# Altium PCB lisa_mx_s_quad.PcbDoc
Units mm, origin at the board's own origin, x right, y up, seen from the top; angles counter-clockwise.
Board outline 25.5 x 25.5 mm, 4 copper layers (Top Layer, Vcc, GND, Bottom Layer); 67 components, 66 nets, 262 pads, 72 vias.
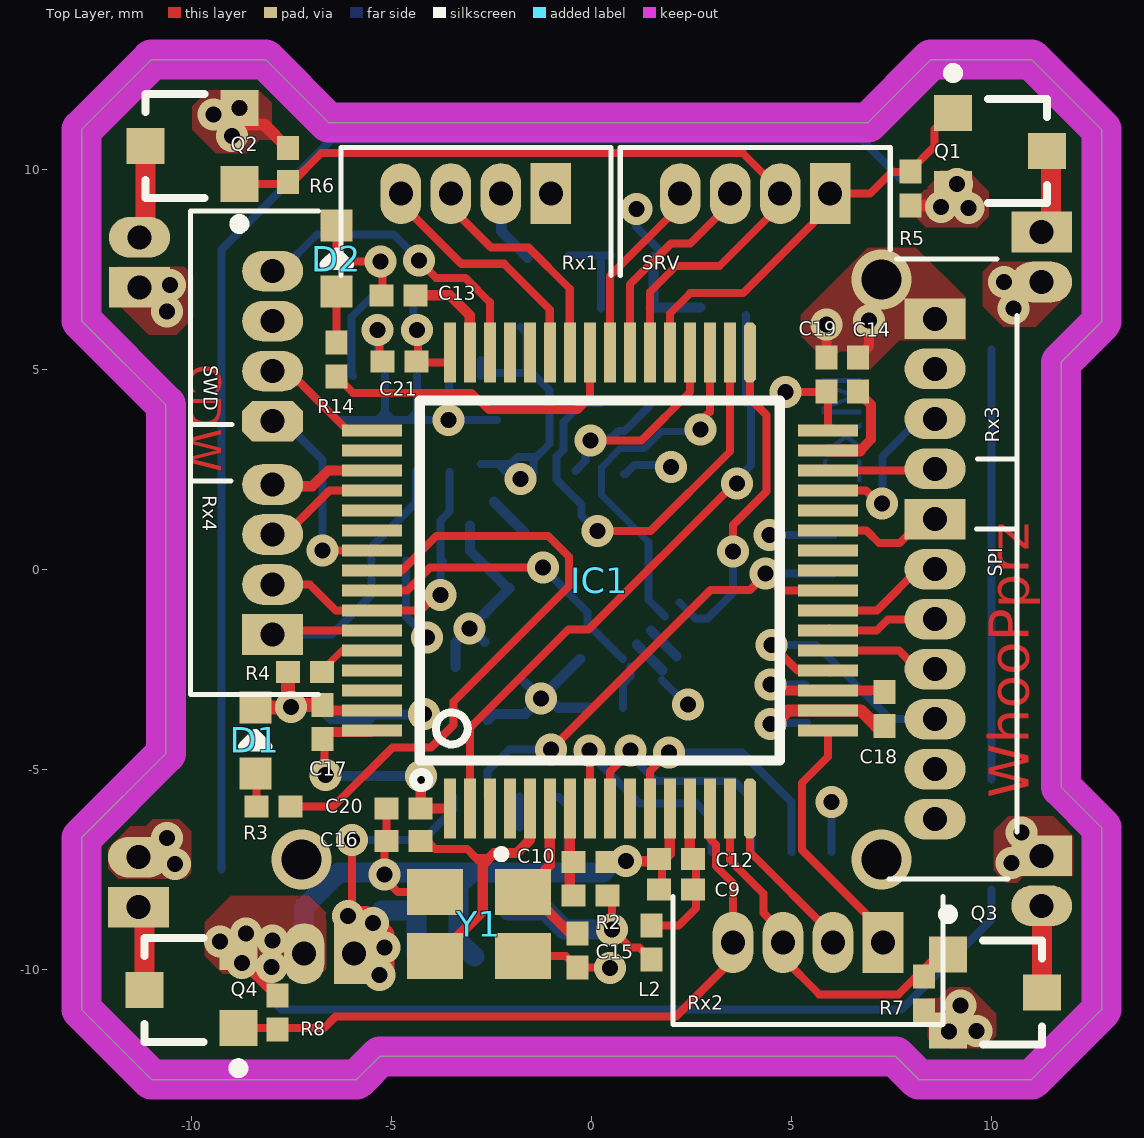
[diagram p0: Top Layer view]
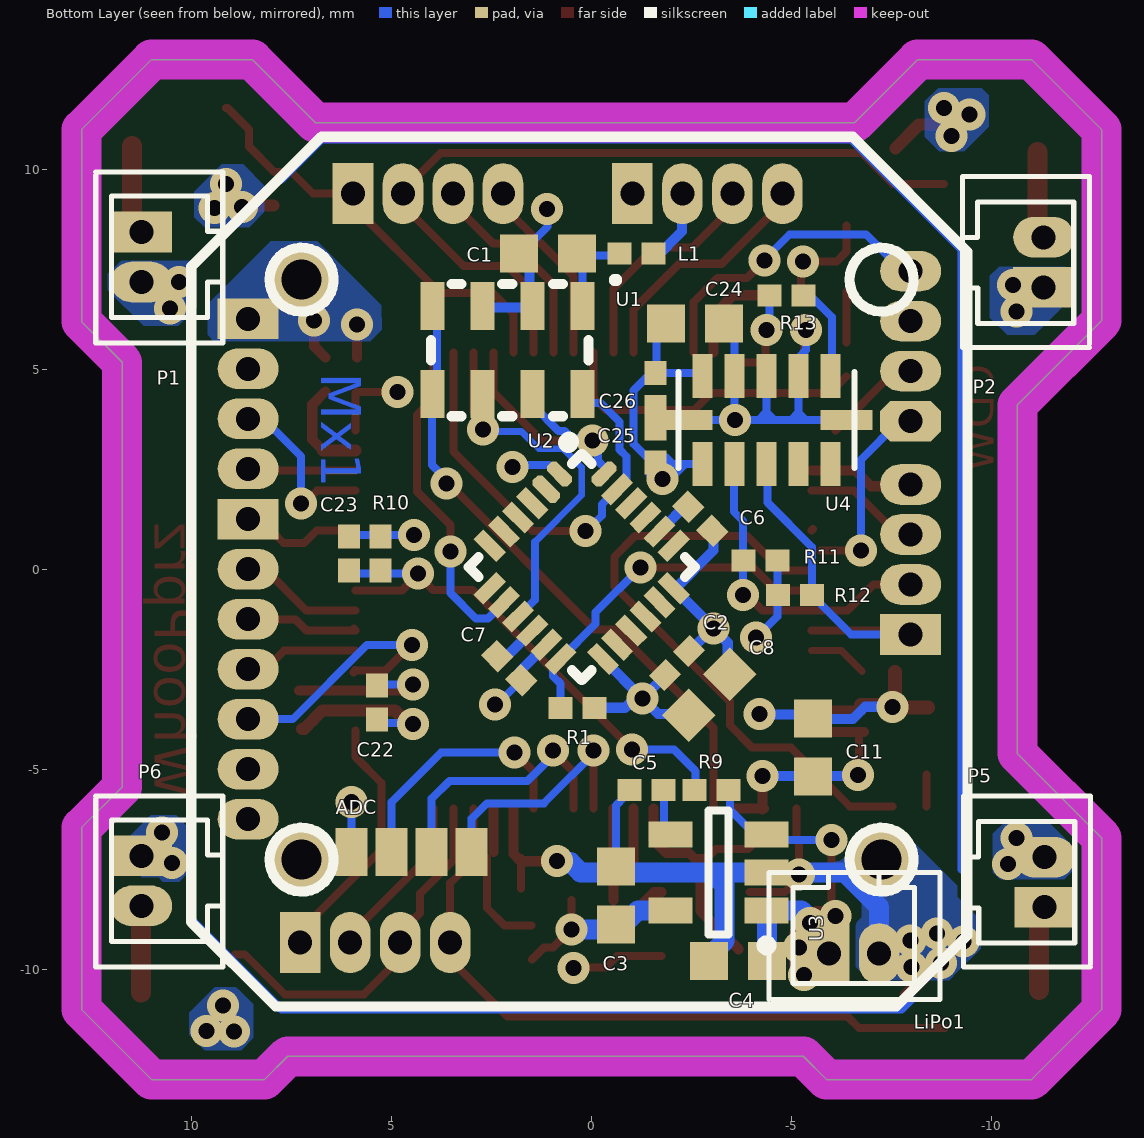
[diagram p1: Bottom Layer view, seen from below]
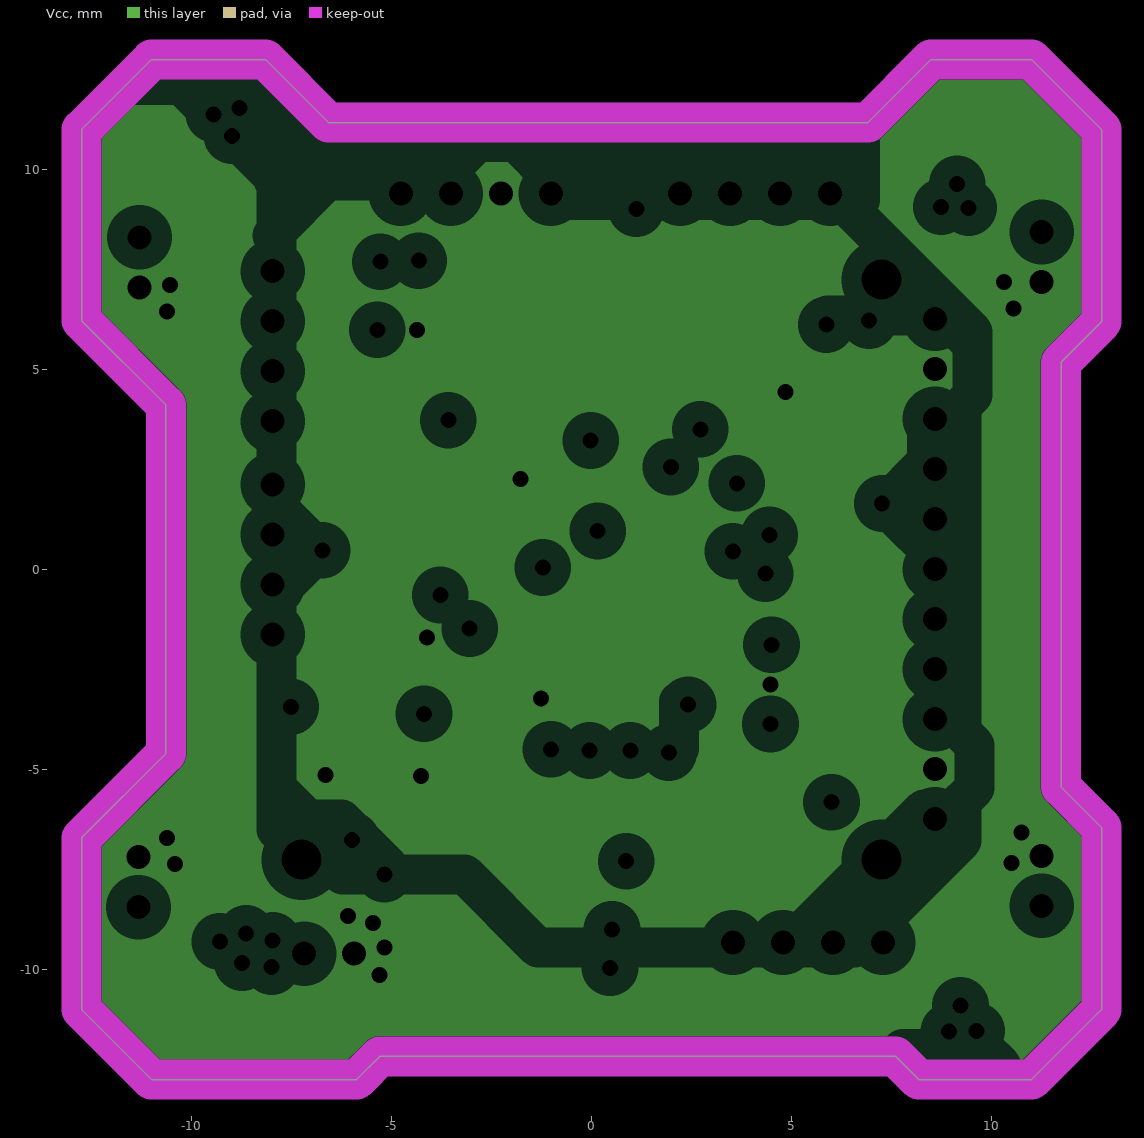
[diagram p2: Vcc, clearances drawn from the general rule]
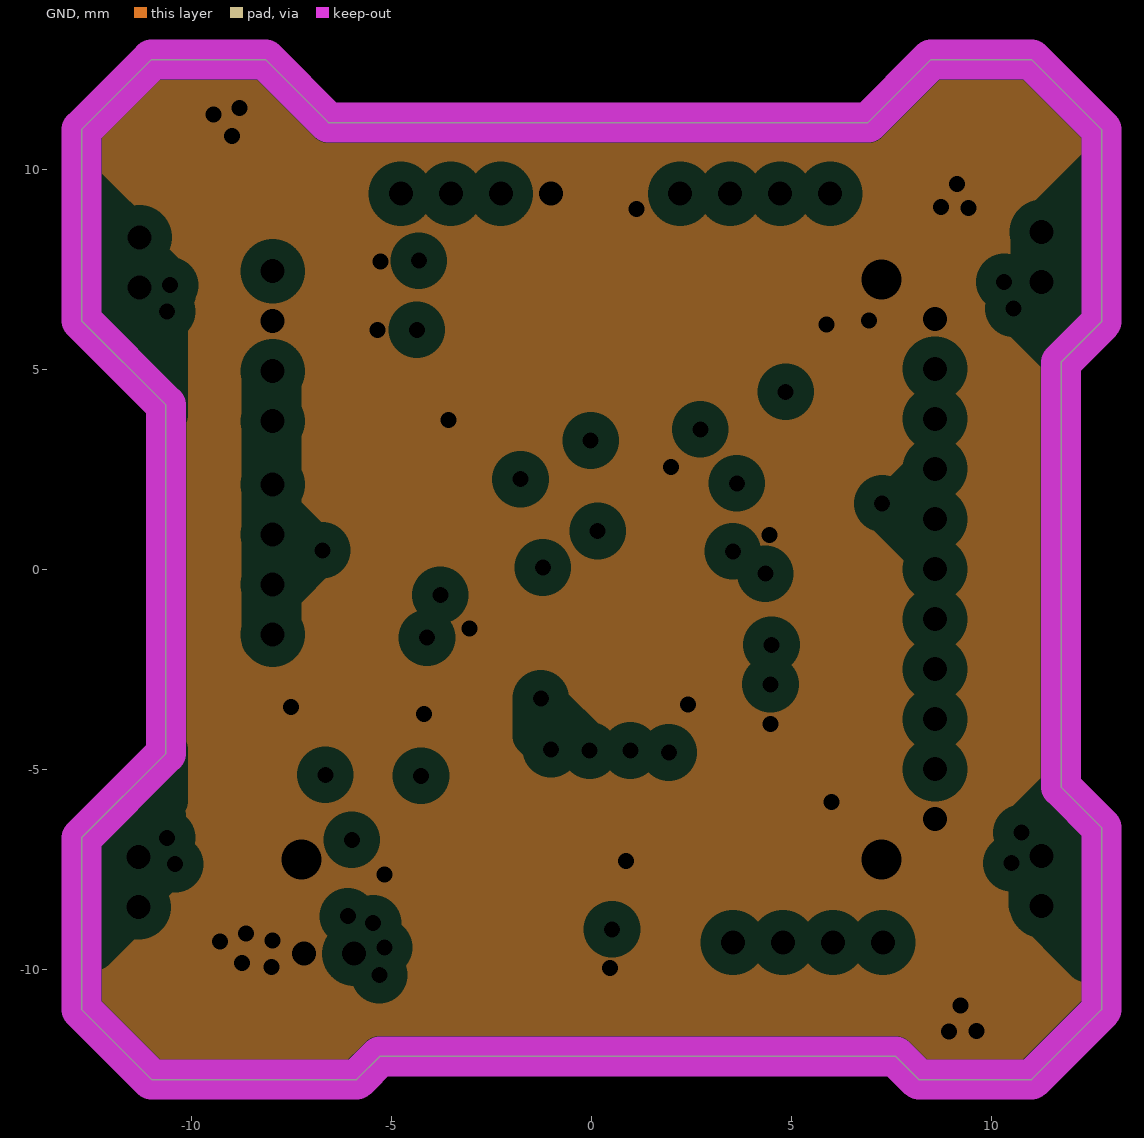
[diagram p3: GND, clearances drawn from the general rule]

## Layer stack, top to bottom
Top Layer: signal copper 0.0356
Dielectric: core 0.32, FR-4, Dk 4.8
Vcc: plane copper 0.0356, net (Multiple Nets)
Dielectric: prepreg 0.32, FR-4, Dk 4.8
GND: plane copper 0.0356, net GND
Dielectric: core 0.32, FR-4, Dk 4.8
Bottom Layer: signal copper 0.0356

## Board outline
-11,-12.75 -12.75,-11 -12.75,-6.705 -10.642,-4.597 -10.642,4.115 -12.75,6.223 -12.75,11 -11,12.75 -8.151,12.75 -6.578,11.177 6.909,11.177 8.483,12.75 11,12.75 12.75,11 12.75,6.197 11.735,5.182 11.735,-5.435 12.75,-6.45 12.75,-11 11,-12.75 8.179,-12.75 7.595,-12.166 -5.291,-12.166 -5.875,-12.75

## Design rules (kind name [scope] priority, off if disabled: settings)
Clearance [All] p1: gap=0.15
ComponentClearance [All] p1 off: gap=0.254 collisioncheckmode=3 verticalgap=0.254 showdistances=FALSE
MinimumSolderMaskSliver [All] p1 off: minsoldermaskwidth=0.254
NetAntennae [All] p1 off: netantennaetolerance=0
PlaneClearance [All] p1: clearance=0.508
PlaneConnect [All] p1: planeconnectstyle=Direct reliefexpansion=0.508 reliefentries=4 reliefconductorwidth=0.254 reliefairgap=0.254
PolygonConnect [All] p1: connectstyle=Direct reliefconductorwidth=0.254 reliefentries=4 polygonreliefangle="90 Angle"
RoutingVias [All] p1: holewidth=0.711 width=1.27 viastyle="Through Hole" minholewidth=0.4 minwidth=0.8 maxholewidth=2 maxwidth=3
SilkToSilkClearance [All] p1 off: silktosilkclearance=0.254
SilkscreenOverComponentPads [All] p1 off: minsilkscreentomaskgap=0.254
SolderMaskExpansion SolderMaskExpansion_1 [IsVia] p1: expansion=-1
SolderMaskExpansion [All] p2: expansion=0.102
TestPointUsage [All] p1: valid=0 allowmultiple=FALSE
Testpoint [All] p1: side=15 testpointundercomponent=TRUE minsize=1.016 maxsize=2.54 preferedsize=1.524 minholesize=0 maxholesize=1.016 preferedholesize=0.813 testpointgrid=0.025 style=1023 order=0-112345678
Width [All] p1: maxlimit=0.5 minlimit=0.15 preferedwidth=0.254 toplayer_prefwidth=0.2 bottomlayer_prefwidth=0.2 minimp=50.000000 maximp=50.000000 favimp=50.000000
17 further rules are at their usual default settings.

## Classes and differential pairs
component class LISA_MX: A_JTAG A_JTAG2 ADC C1 C2 C3 C4 C5 C6 C7 C8 C9 C10 C11 C12 C13 C14 C15 C16 C17 C18 C19 C20 C21 C22 C23 C24 C25 C26 C? D1 D2 IC1 L1 L2 R1 R2 R3 R4 R9 R10 R11 R12 R13 R14 R? Rx1 Rx2 Rx3 Rx4 SPI SRV SWD U1 U2 U3 U4 X5 Y1
component class whoop: LiPo1 P1 P2 P5 P6 Q1 Q2 Q3 Q4 R5 R6 R7 R8

## Components (designator, comment, footprint, x,y, rotation, side; value= is the part's Value field where it differs from the comment)
ADC "Header 4" 4pin1mmpitch 2.998,-7.061 r0 bottom
C1 "0603" V0603 1.093,7.9 r180 bottom
C2 "0402" V0402 -2.133,-2.336 r135 bottom
C3 "0603" V0603 -0.609,-8.153 r270 bottom
C4 "0603" V0603 -3.657,-9.778 r180 bottom
C5 "0402" V0402 -1.371,-5.511 r180 bottom
C6 "0402" V0402 -2.717,1.271 r225 bottom
C7 "0402" V0402 2.058,-2.463 r225 bottom
C8 "0603" V0603 -2.946,-3.124 r315 bottom
C9 "0402" V0402 2.109,-8 r0 top
C10 "0402" V0402 -0.025,-7.315 r180 top
C11 "0603" V0603 -5.537,-4.444 r90 bottom
C12 "0402" V0402 2.109,-7.238 r0 top
C13 "0402" V0402 -4.825,6.859 r0 top
C14 "0402" V0402 6.655,4.877 r270 top
C15 "0402" V0402 -0.355,-9.524 r90 top
C16 "0402" V0402 -4.698,-6.781 r180 top
C17 "0402" V0402 -6.73,-3.809 r270 top
C18 "0402" V0402 7.316,-3.479 r90 top
C19 "0402" V0402 5.868,4.877 r270 top
C20 "0402" V0402 -4.698,-5.968 r0 top
C21 "0402" V0402 -4.8,5.208 r0 top
C22 "0402" V0402 5.36,-3.327 r90 bottom
C23 "0402" V0402 6.071,0.407 r270 bottom
C24 "0603" V0603 -2.59,6.147 r0 bottom
C25 "0402" V0402 -1.6,3.099 r90 bottom
C26 "0402" V0402 -1.6,4.496 r270 bottom
D1 "RED" KP-1608SURC_R -8.407,-4.267 r90 top
D2 "RED" KP-1608SURC_R -6.375,7.772 r90 top
IC1 "STM32F40x-RG_Dirk" LQFP64 0.204,-0.271 r90 top
L1 "0402" V0402RES -1.117,7.9 r0 bottom
L2 "0402" V0402RES 1.499,-9.321 r90 top
LiPo1 "Header 2" PICOBLADE_53047-0210 -5.918,-9.601 r270 bottom
P1 "Header 2" PICOBLADE_53047-0210 11.253,8.459 r0 bottom
P2 "Header 2" PICOBLADE_53047-0210 -11.302,7.036 r180 bottom
P5 "Header 2" PICOBLADE_53047-0210 -11.328,-8.458 r180 bottom
P6 "Header 2" PICOBLADE_53047-0210 11.253,-7.137 r0 bottom
Q1 "N-FET" SOT23A_CDW 10.211,10.465 r270 top
Q2 "N-FET" SOT23A_CDW -9.982,10.592 r90 top
Q3 "N-FET" SOT23A_CDW 10.084,-10.566 r270 top
Q4 "N-FET" SOT23A_CDW -10.007,-10.515 r90 top
R1 "0402" V0402RES 0.356,-3.454 r180 bottom
R2 "0402" V0402RES -0.025,-8.153 r0 top
R3 "0402" V0402RES -7.95,-5.918 r180 top
R4 "0402" V0402RES -7.162,-2.565 r0 top
R5 "0402" V0402RES 7.976,9.526 r90 top
R6 "0402" V0402RES -7.594,10.11 r270 top
R7 "0402" V0402RES 8.306,-10.591 r90 top
R8 "0402" V0402RES -7.848,-11.074 r270 top
R9 "0402" V0402RES -2.997,-5.511 r180 bottom
R10 "0402" V0402RES 5.284,0.407 r270 bottom
R11 "0402" V0402RES -4.216,0.229 r180 bottom
R12 "0402" V0402RES -5.079,-0.634 r0 bottom
R13 "0402" V0402RES -4.877,6.858 r0 bottom
R14 "0402" V0402RES -6.375,5.258 r90 top
Rx1 "Header 4" PICOBLADE_53047-0410#1 -1.117,9.424 r90 top
Rx2 "Header 4" PICOBLADE_53047-0410#1 7.189,-9.296 r90 top
Rx3 "Header 4" PICOBLADE_53047-0410#1 8.56,6.173 r180 top
Rx4 "Header 4" PICOBLADE_53047-0410#1 -7.95,-1.523 r0 top
SPI "Header 7" PICOBLADE_53047-0710 8.586,1.194 r180 top
SRV "Header 4" PICOBLADE_53047-0410#1 5.868,9.424 r90 top
SWD "Header 4" PICOBLADE_53047-0410#2 -7.95,3.811 r0 top
U1 "MS5611-01BA01 or 03" MS5611-01BA 2.109,5.487 r270 bottom
U2 "MPU6000, MPU6050 or MPU9150" MPU60X0 0.247,0.066 r225 bottom
U3 "3.3V LDO" SOT-23-OT5_N -3.174,-7.569 r0 bottom
U4 "VL53L0X" VL53L0Xtra -4.368,3.734 r0 bottom
Y1 "3SMXB" CFPX-5 -2.819,-8.864 r180 top

## Footprints (in the part's own frame and the unit in brackets; to place one, negate y for a bottom-side part, rotate by r counter-clockwise, add the part's x,y. Pads: shape width x height; smd on the part's side, far side on the other; paste and mask are expansions set on the pad)
4pin1mmpitch [mm]
  rect 0.8x1.2 smd: 1(0,0) 2(1,0) 3(2,0) 4(3,0)
CFPX-5 [mm] "Quartz Crystal, SM; Body 3.4 x 2.7 mm (LxW max)"
  rect 1.4x1.15 smd: 1(-1.1,-0.8) 2(1.1,-0.8) 3(1.1,0.8) 4(-1.1,0.8)
  silkscreen extent -0.66,-1.85 -0.46,-1.65, body extent -1.9,-1.48 1.9,1.48, height 1
KP-1608SURC_R [mm]
  rect 0.8x0.8 smd: 1(-0.825,0) 2(0.825,0)
  silkscreen extent -0.15,-0.3 0.15,0.3, body extent -0.81,-0.41 0.79,0.38, height 1
LQFP64 [mm]
  rect 1.5x0.3 smd: 1(-5.7,3.75) 2(-5.7,3.25) 3(-5.7,2.75) 4(-5.7,2.25) 5(-5.7,1.75) 6(-5.7,1.25) 7(-5.7,0.75) 8(-5.7,0.25) 9(-5.7,-0.25) 10(-5.7,-0.75) 11(-5.7,-1.25) 12(-5.7,-1.75) 13(-5.7,-2.25) 14(-5.7,-2.75) 15(-5.7,-3.25) 34(5.7,-3.25) 35(5.7,-2.75) 36(5.7,-2.25) 37(5.7,-1.75) 38(5.7,-1.25) 39(5.7,-0.75) 40(5.7,-0.25) 41(5.7,0.25) 42(5.7,0.75) 43(5.7,1.25) 44(5.7,1.75) 45(5.7,2.25) 46(5.7,2.75) 47(5.7,3.25) 48(5.7,3.75)
  oct 1.5x0.3 smd: 16(-5.7,-3.75) 33(5.7,-3.75)
  rect 0.3x1.5 smd: 17(-3.75,-5.7) 18(-3.25,-5.7) 19(-2.75,-5.7) 20(-2.25,-5.7) 21(-1.75,-5.7) 22(-1.25,-5.7) 23(-0.75,-5.7) 24(-0.25,-5.7) 25(0.25,-5.7) 26(0.75,-5.7) 27(1.25,-5.7) 28(1.75,-5.7) 29(2.25,-5.7) 30(2.75,-5.7) 31(3.25,-5.7) 32(3.75,-5.7) 49(3.75,5.7) 50(3.25,5.7) 51(2.75,5.7) 52(2.25,5.7) 53(1.75,5.7) 54(1.25,5.7) 55(0.75,5.7) 56(0.25,5.7) 57(-0.25,5.7) 58(-0.75,5.7) 59(-1.25,5.7) 60(-1.75,5.7) 61(-2.25,5.7) 62(-2.75,5.7) 63(-3.25,5.7) 64(-3.75,5.7)
  silkscreen extent -5.19,-4.5 4.5,4.67, body extent -4.5,-4.5 4.5,4.5, height 2.54
MPU60X0 [mm] "4X4MM"
  oct 0.724x0.345 smd: 1(-2.038,1.25)
  oct 0.8x0.345 smd: 2(-2,0.75)
  rect 0.8x0.345 smd: 3(-2,0.25) 4(-2,-0.25) 5(-2,-0.75) 6(-2,-1.25) 13(2,-1.25) 14(2,-0.75) 15(2,-0.25) 16(2,0.25) 17(2,0.75) 18(2,1.25)
  rect 0.345x0.8 smd: 7(-1.25,-2) 8(-0.75,-2) 9(-0.25,-2) 10(0.25,-2) 11(0.75,-2) 12(1.25,-2) 19(1.25,2) 20(0.75,2) 21(0.25,2) 22(-0.25,2) 23(-0.75,2)
  oct 0.345x0.724 smd: 24(-1.25,2.038)
  silkscreen extent -2.44,-2 2,2, body extent -2,-2 2,2, height 0.9
MS5611-01BA [mm] "Precision Barometer"
  rect 1.2x0.6 smd: 1(-1.1,1.875) 2(-1.1,0.625) 3(-1.1,-0.625) 4(-1.1,-1.875) 5(1.1,-1.875) 6(1.1,-0.625) 7(1.1,0.625) 8(1.1,1.875)
  silkscreen extent -1.78,-1.91 1.65,2.74, body extent -1.5,-2.5 1.5,2.5, height 1.7
PICOBLADE_53047-0210 [mil]
  rect 60x40 hole 23.62: 1(0,0.79)
  oval 60x40 hole 23.62: 2(0,50)
  silkscreen extent -80,-58 45,110, body extent -80,-60 45,110, height 118
PICOBLADE_53047-0410#1 [mil]
  rect 60x40 hole 23.62: 1(-1,-3.82)
  oval 60x40 hole 23.62: 2(-1,45.39) 3(-1,94.61) 4(-1,143.82)
  silkscreen extent -82,-63 44,203
PICOBLADE_53047-0410#2 [mil]
  oct 60x40 hole 23.62: 1(-1,-3.82)
  oval 60x40 hole 23.62: 2(-1,45.39) 3(-1,94.61) 4(-1,143.82)
  silkscreen extent -82,-63 44,203
PICOBLADE_53047-0710 [mil]
  rect 60x40 hole 23.62: 1(0,-2.64)
  oval 60x40 hole 23.62: 2(0,46.57) 3(0,95.79) 4(0,145) 5(0,194.21) 6(0,243.43) 7(0,292.64)
  silkscreen extent -81,-62 45,352
SOT23A_CDW [mm] "SOT-23; 3 Leads; Body 3.0 x 2.5 mm, inc. leads (LxW max)"
  rect 0.9x0.95 smd: 1(-0.95,-1.175) 2(0.95,-1.175) 3(0,1.175)
  silkscreen extent -2.07,-1.3 1.3,1.18, body extent -1.27,-1.46 1.27,1.46, height 1.3
SOT-23-OT5_N [mm] "SOT23, 5-Leads, Body 2.9x1.6mm, Pitch 0.95mm, Lead Span 2.7mm, IPC Medium Density"
  rect 1.1x0.65 smd: 1(-1.2,0.95) 2(-1.2,0) 3(-1.2,-0.95) 4(1.2,-0.95) 5(1.2,0.95)
  silkscreen extent -1.32,-1.55 0.25,1.95, body extent -0.9,-1.55 0.9,1.55, height 1.45
V0402 [mm] "Chip Capacitor; Body 1.0 x 0.5 mm (LxW typ)"
  rect 0.6x0.55 smd: 1(-0.425,0) 2(0.425,0)
  body extent -0.5,-0.25 0.5,0.25, height 0.5
V0402RES [mm] "Chip Capacitor; Body 1.0 x 0.5 mm (LxW typ)"
  rect 0.6x0.55 smd: 1(-0.425,0) 2(0.425,0)
  body extent -0.5,-0.25 0.5,0.25, height 0.25
V0603 [mm] "Chip Capacitor; Body 1.6 x 0.8 mm (LxW typ)"
  rect 0.95x0.95 smd: 1(-0.725,0) 2(0.725,0)
  body extent -0.8,-0.4 0.8,0.4, height 0.7
VL53L0Xtra [mm]
  rect 0.5x1.1 smd: 1(1.6,-1.1) 2(0.8,-1.1) 3(0,-1.1) 4(-0.8,-1.1) 5(-1.6,-1.1) 7(-1.6,1.1) 8(-0.8,1.1) 9(0,1.1) 10(0.8,1.1) 11(1.6,1.1)
  rect 1.3x0.5 smd: 6(-2,0) 12(2,0)
  silkscreen extent -2.2,-1.2 2.2,1.2, body extent -2.2,-1.2 2.2,1.2, height 1.05

## Part data
ADC Rx1 Rx2 Rx3 Rx4 SRV SWD: "Header, 4-Pin"
C1 C5 C8 C9 C10 C11 C12 C13 C14 C15 C16 C17 C18 C19 C20 C21 C22 C23: library part Cap, "Capacitor"
C2 C6 C7 C25 C26: library part CAP, "Capacitor"
C3 C4 C24: library part K0603_100nF_50V_X7R, "Capacitor"
D1 D2: library part LED2, "Typical RED, GREEN, YELLOW, AMBER GaAs LED"
L1 L2 R1 R2 R3 R4 R5 R6 R7 R8 R9 R10 R11 R12 R13 R14: library part Res3, "Resistor"
LiPo1 P1 P2 P5 P6: "Header, 2-Pin"
Q1 Q2 Q3 Q4: library part BSS138, "BSS138"
SPI: "Header, 7-Pin"
U1: library part MS5611-01BA01, "MS5611-01BA01 High Resolution Barometer Module"
U2: library part MPU6000, "INVENSENSE Integrated Dual Axis Gyroscope"
U3: library part LP2992AIM5-5.0, "Micropower 250 mA Low-Noise Ultra Low-Dropout Regulator in SOT-23 and LLP Packages"
Y1: "Surface Mount Quartz Crystal"

## Via types
v1: diameter 0.8, hole 0.4, Top Layer to Bottom Layer, 69 vias
v2: diameter 1.5, hole 1, Top Layer to Bottom Layer, 3 vias

## Nets (pads, with @x,y where several pads share a name; then routed paths per layer and width w, separated by ;. In a path a pad name is that pad's centre, name@x,y a point inside that pad or via, vN(x,y) a via of type N, cw(c..) or ccw(c..) an arc to the next point about the centre after c; other vN are vias at no path point)
+3.3V: C2.1 C3.2 C8.2 C11.1 C17.2 C18.2 C19.2 C20.2 C21.2 C22.2 C24.2 C25.1 C26.1 IC1.1 IC1.19 IC1.32 IC1.48 IC1.64 L1.1 L2.1 R1.2 R2.2 R11.2 R12.2 R13.2 Rx1.2 Rx3.2 SPI.6 U2.13 U3.5 U4.1 U4.11 | length 36
  Top Layer w0.2: v1@-6.68,-5.105 C17.2@-6.68,-4.235 ; C21.2@-4.417,5.182 IC1.48@-3.606,5.182 ; C21.2@-4.343,5.208 v1@-4.343,6.039 ; v1@-4.273,-5.162 v1(-4.267,-5.156) ; R2.2@0.509,-8.261 v1(0.509,-8.991) 0.964,-9.446 1.192,-9.446 L2.1@1.492,-9.746 ; v1(4.852,4.446) C19.2@5.861,4.446 ; IC1.32 C19.2@5.904,4.416
  Top Layer w0.254: C17.2@-6.811,-4.06 IC1.64@-5.536,-4.06 ; C20.2@-4.305,-5.971 IC1.1 ; C20.2@-4.273,-5.994 v1@-4.273,-5.162 ; v1@4.42,-2.641 4.8,-3.021 IC1.19 C18.2@7.316,-3.021
  Bottom Layer w0.2: R11.2 -4.641,-1.175 v1(-4.114,-1.701) ; v1@-4.452,6.007 R13.2 ; v1@-4.44,5.995 v1(-4.368,5.995) ; U4.11 v1@-1.912,2.634 ; U4.1 U4.1@-2.768,5.244 ; U4.1@-2.681,4.921 C26.1 ; -2.336,2.634 -2.065,2.363 -1.879,2.363 v1(-1.777,2.261) -1.676,2.363 -1.473,2.363 -1.447,2.388 C25.1@-1.447,2.751 ; -2.031,2.634 -1.846,2.82 -1.375,2.82 -1.049,3.146 -1.049,4.479 -1.625,5.055 -1.625,5.919 C24.2@-1.777,6.071 ; v1@4.496,-2.87 C22.2@5.353,-2.87
  Bottom Layer w0.254: v1@-6.73,-5.156 v1(-4.267,-5.156) ; C8.2@-2.611,-3.763 -2.454,-3.606 -1.657,-3.606 v1(-1.269,-3.218) ; Rx1.2@-2.27,8.982 -2.26,8.972 -2.26,8.459 L1.1@-1.6,7.798 ; C2.1@-1.653,-2.834 v1(-1.269,-3.218) ; v1@-1.177,-3.126 -1.165,-3.126 -0.838,-3.454 R1.2 ; U2.13 v1(-1.269,-3.218)
  Bottom Layer w0.5: U3.5@-2.076,-8.519 -1.158,-8.519 -0.685,-8.991 v1(0.509,-8.991)
  other v1: -6.655,-5.131 4.471,-2.87
+3.3V_AP_ANALOG: C9.2 C12.2 IC1.13 L2.2 | length 3.6
  Top Layer w0.2: L2.2 2.178,-8.896 2.61,-8.464 C12.2@2.61,-7.213
  Top Layer w0.254: C12.2@2.454,-7.058 IC1.13
ADC1A: ADC.3 IC1.11 | length 6.4
  Top Layer w0.2: IC1.11 1.454,-5.048 v1(1.931,-4.571)
  Bottom Layer w0.2: v1(1.931,-4.571) 3.76,-4.571 4.998,-5.809 ADC.3
ADC2A: ADC.1 IC1.8 | length 6.1
  Top Layer w0.2: v1@-0.304,-4.622 -0.046,-4.88 IC1.8
  Bottom Layer w0.2: v1@-0.126,-4.521 1.194,-5.841 2.617,-5.841 2.998,-6.222 ADC.1
  other v1: -0.05,-4.521
ADC3A: ADC.2 IC1.9 | length 6.7
  Top Layer w0.2: IC1.9 0.454,-5.058 0.813,-4.698 v1@0.813,-4.495
  Bottom Layer w0.2: v1@0.813,-4.495 1.601,-5.283 3.557,-5.283 3.998,-5.724 ADC.2
  other v1: 0.966,-4.521
BARO_CS: IC1.2 U1.4 U1.5 | length 15.6
  Top Layer w0.2: IC1.2 -3.046,-3.96 -0.584,-1.498 -0.076,-1.498 v1@3.581,2.159
  Bottom Layer w0.2: v1@3.581,2.21 3.988,2.617 U1.5@3.988,4.293 ; U1.5@3.861,4.166 U1.4@3.861,6.366
  other v1: 3.632,2.159
BOOTA: IC1.60 R4.2 | length 1.5
  Top Layer w0.178: R4.2@-6.756,-2.539 -6.241,-2.025 IC1.60@-5.504,-2.025
BYPCA: C5.2 U3.4 | length 0.8
  Bottom Layer w0.2: U3.4@-1.803,-6.452 C5.2@-1.803,-5.675
CPOUT_A: C6.1 U2.20 | length 1.1
  Bottom Layer w0.254: C6.1@-2.444,1.696 U2.20
DRDY: IC1.27 SPI.1 | length 2.3
  Top Layer w0.2: IC1.27 6.87,0.979 7.189,0.661 7.697,0.661 SPI.1@7.976,0.94
GND: ADC.4 C1.1 C2.2 C3.1 C4.1 C5.1 C6.2 C7.2 C8.1 C9.1 C10.1 C11.2 C12.1 C13.1 C14.1 C15.1 C16.2 C17.1 C18.1 C19.1 C20.1 C21.1 C22.1 C23.1 C24.1 C25.2 C26.2 D1.2 D2.2 IC1.12 IC1.18 IC1.63 LiPo1.2 Q1.2 Q2.2 Q3.2 Q4.2 R4.1 R5.1 R6.1 R7.1 R8.1 R10.1 Rx1.1 Rx3.1 SPI.7 SWD.3 U1.2 U1.3 U2.1 U2.11 U2.18 U3.2 U4.2 U4.3 U4.4 U4.6 U4.12 Y1.2 Y1.4 | length 67.7
  Top Layer w0.2: D2.2 -6.375,7.95 -6.122,7.697 v1(-5.283,7.697) ; C21.1@-5.308,5.208 v1@-5.308,6.078 ; C13.1@-5.232,6.859 v1@-5.232,7.607 ; v1@-5.182,-7.779 C16.2@-5.182,-6.833 ; v1@-5.123,-7.779 -4.838,-8.064 Y1.2@-3.944,-8.064 ; C16.2 C20.1 ; Y1.4@-1.744,-9.664 -0.64,-9.664 C15.1 v1@0.451,-9.949 ; C9.1@1.76,-7.975 C12.1@1.76,-7.213
  Top Layer w0.254: C17.1@-6.761,-3.521 IC1.63 ; v1(0.864,-7.289) 1.771,-7.289 1.954,-7.107 IC1.12 ; C19.1 v1@5.868,6.381 ; C14.1 6.935,5.582 v1(6.935,6.228) v1@7.011,6.305
  Top Layer w0.305: v1(-8.991,10.846) -8.762,11.075 -8.762,11.278 -8.61,11.126 -8.185,11.126 R6.1 ; Q4.2@-8.832,-9.665 R8.1 ; v1@4.674,-3.759 4.912,-3.521 IC1.18 6.732,-3.521 6.956,-3.745 6.956,-3.755 7.186,-3.985 C18.1@7.235,-3.985 ; R5.1@7.951,9.101 Q1.2@8.706,9.101
  Top Layer w0.35: D1.2 v1@-7.532,-3.442 ; v1@-7.587,-3.271 R4.1 ; v1@-7.474,-3.384 C17.1
  Bottom Layer w0.2: U4.6 U4.12 ; -5.359,3.734 -5.168,3.925 ; v1(-5.359,5.995) -5.359,5.487 U4.4@-5.168,5.296 ; U4.4 -5.168,3.925 ; -4.978,3.734 -5.168,3.925 ; -4.571,3.734 -4.368,3.938 ; U4.3 -4.368,3.938 ; -4.165,3.734 -4.368,3.938 ; v1@-3.759,3.734 v1@-3.568,3.925 ; v1@-3.733,3.925 v1@-3.568,4.09 ; C24.1@-3.568,5.823 U4.2 v1@-3.568,3.925 ; v1@-3.378,3.734 v1@-3.568,3.925 ; C5.1@-0.971,-5.689 -0.813,-5.689 -0.609,-5.893 C3.1 ; U2.1 0.842,2.391 1.067,2.617 2.058,2.617 v1@2.109,2.668 ; v1@1.107,8.826 1.107,8.572 C1.1@1.652,8.027 ; C7.2 v1@2.371,-3.378 ; v1(4.446,0.864) C23.1@6.064,0.864 ; v1@4.496,-3.835 C22.1@5.379,-3.835 ; ADC.4 v1(5.998,-5.813)
  Bottom Layer w0.254: v1(-7.518,-3.428) -6.833,-3.428 -6.528,-3.734 C11.2@-5.537,-3.734 ; C11.2@-5.486,-3.618 v1@-4.369,-3.618 ; C8.1@-3.403,-2.438 -3.403,-1.828 v1(-3.047,-1.473) ; C6.2@-3.043,1.097 -3.043,0.479 -2.1,-0.464 U2.18 -3.037,-1.45 -2.679,-1.809 ; U2.11 C7.2@1.766,-2.514 ; U1.2@1.468,6.554 U1.3@2.718,6.554 ; U1.2@1.55,6.605 C1.1@1.55,7.812
  Bottom Layer w0.5: LiPo1.2@-7.188,-9.448 -7.188,-8.432 -6.324,-7.569 0.28,-7.569 v1@0.534,-7.315 ; -3.327,-7.594 -3.327,-8 ; -2.997,-7.569 -3.327,-7.899 -3.327,-8 ; C4.1@-2.932,-9.677 -3.327,-9.282 -3.327,-8
  other v1: 8.935,-11.541 9.627,-11.531 9.221,-10.896 0.458,-9.956 -8.001,-9.931 -8.738,-9.83 -9.296,-9.296 -7.976,-9.271 -8.636,-9.093 -5.181,-7.619 4.471,-3.86 -4.191,-3.607 2.414,-3.378 1.982,2.566 -3.581,3.734 5.868,6.122 1.118,9.018 9.424,9.043 8.738,9.068 9.138,9.642 -9.448,11.38 -8.807,11.542
  other v2: -7.25,-7.25 7.25,-7.25 7.25,7.25
GPIO: U4.7
IMU_CS: IC1.33 U2.8 | length 8.5
  Top Layer w0.2: v1(3.531,0.458) 3.531,1.118 4.369,1.956 4.369,3.862 3.954,4.277 IC1.33
  Bottom Layer w0.2: U2.8 2.592,-1.219 2.896,-1.219 3.531,-0.584 3.531,0.417 v1@3.673,0.559
IMU_MISO: IC1.35 U1.6 U2.9 | length 9.1
  Top Layer w0.2: v1@2.654,3.645 2.954,3.945 IC1.35
  Bottom Layer w0.17: 1.417,0.693 0.247,1.862 0.247,2.558 0.712,3.023 1.321,3.023 1.753,3.455 v1@2.718,3.455
  Bottom Layer w0.2: 1.417,0.693 1.417,-0.755 1.833,-1.171 U2.9
  other v1: 2.718,3.506
IMU_MOSI: IC1.36 U1.7 U2.24 | length 6.9
  Top Layer w0.2: v1@-0.177,3.226 1.245,3.226 2.454,4.435 IC1.36
  Bottom Layer w0.2: U2.24@-0.406,2.464 -0.158,2.712 v1@-0.158,3.22 ; v1@-0.152,3.277 0.483,3.277 0.674,3.468 0.826,3.468 U1.7@1.448,4.09
  other v1: -0.025,3.226
IMU_MPU_INT: IC1.57 R1.1 U2.12 | length 8.7
  Top Layer w0.203: IC1.57 -4.61,-0.521 -4.038,0.051 v1(-1.219,0.051)
  Bottom Layer w0.203: v1(-1.219,0.051) -0.101,-1.066 -0.101,-1.354 U2.12 ; R1.1 0.781,-2.851 0.966,-2.666 U2.12@0.966,-2.421
IMU_SCK: IC1.34 U1.8 U2.23 | length 11
  Top Layer w0.2: v1@0.128,0.966 1.474,0.966 3.455,2.947 IC1.34 IC1.34
  Bottom Layer w0.2: v1@0.166,0.928 -0.253,1.347 -0.253,1.627 U2.23 -0.877,2.251 -0.877,2.823 -0.699,3.001 -0.699,3.695 -0.228,4.166 U1.8@0.229,4.166
  other v1: 0.153,0.966
JTAG_TCK: IC1.49 SWD.2 | length 2.4
  Top Layer w0.2: SWD.2@-7.873,4.964 -7.579,4.964 IC1.49@-6.094,3.479
JTAG_TDI: IC1.50
JTAG_TDO: IC1.55 SWD.1 | length 4.6
  Top Layer w0.2: v1@-6.69,0.479 IC1.55@-5.718,0.479
  Bottom Layer w0.2: SWD.1@-7.873,3.714 -7.7,3.714 -6.73,2.744 -6.73,0.763 v1@-6.654,0.686
  other v1: -6.73,0.483
JTAG_TMS: IC1.46 SWD.4 | length 8
  Top Layer w0.2: v1(-4.317,7.722) -3.886,7.29 -3.15,7.29 -2.546,6.686 IC1.46
  Bottom Layer w0.2: SWD.4 -7.776,7.464 -6.857,8.383 -4.952,8.383 -4.356,7.786 v1@-4.025,7.786
L1: D2.1 R14.2 | length 1.3
  Top Layer w0.2: R14.2 D2.1
L2: D1.1 R3.2 | length 0.8
  Top Layer w0.2: R3.2 D1.1@-8.375,-5.124
LED1: IC1.41 R14.1 | length 7.9
  Top Layer w0.2: R14.1 -5.962,4.42 -2.997,4.42 -2.565,3.988 -0.356,3.988 -0.046,4.297 IC1.41
LED2: IC1.56 R3.1 | length 15.8
  Top Layer w0.2: R3.1 -6.452,-5.918 -4.978,-4.445 -4.013,-4.445 -3.454,-3.886 -3.454,-3.302 -0.569,-0.416 -0.569,0.321 -1.086,0.838 -3.884,0.838 -4.742,-0.021 IC1.56
LED3: IC1.10
LED4: IC1.25
LED5: IC1.4
LIPO: C4.2 LiPo1.1 P1.2 P2.1 P5.2 P6.1 R9.2 U3.1 U3.3 | length 10.6
  Top Layer w0.2: LiPo1.1@-5.994,-9.469 v1@-5.994,-6.731
  Top Layer w0.5: v1(-6.096,-8.661) -5.638,-8.661 v1(-5.46,-8.839) -5.181,-9.118 v1@-5.181,-10.007
  Bottom Layer w0.2: v1(-5.994,-6.756) U3.3@-4.309,-6.756 ; U3.3@-4.079,-6.619 -3.454,-5.994 -3.454,-5.696 R9.2@-3.447,-5.689
  Bottom Layer w0.5: LiPo1.1@-5.938,-9.214 -5.242,-8.519 U3.1 ; C4.2@-4.382,-9.677 U3.1@-4.382,-8.526
  other v1: -5.309,-10.135 -5.181,-9.448 -10.413,-7.365 10.491,-7.34 -10.617,-6.705 10.745,-6.578 -10.617,6.452 10.542,6.528 -10.54,7.113 10.313,7.189
M1: P6.2 Q3.3 | length 2.2
  Top Layer w0.5: P6.2 11.259,-8.413 Q3.3
M2: P5.1 Q4.3 | length 1.9
  Top Layer w0.5: Q4.3 P5.1@-11.182,-8.583
M3: P1.1 Q1.3 | length 1.9
  Top Layer w0.5: P1.1@11.488,8.674 Q1.3@11.488,10.592
M4: P2.2 Q2.3 | length 2.1
  Top Layer w0.5: P2.2@-11.15,8.3 Q2.3@-11.15,10.44
MISO: IC1.22 SPI.3 | length 2.6
  Top Layer w0.2: IC1.22@5.946,-1.478 IC1.22 7.128,-1.521 7.404,-1.244 SPI.3@8.357,-1.244
MOSI: IC1.23 SPI.2 | length 2.9
  Top Layer w0.2: IC1.23 7.133,-1.021 8.23,0.077 SPI.2@8.306,0.077
NRSTA: C10.2 IC1.7 R2.1 | length 2.3
  Top Layer w0.254: R2.1@-0.546,-8.267 IC1.7
OSC_INA: C16.1 IC1.5 Y1.3 | length 6.7
  Top Layer w0.2: C16.1@-4.089,-6.807 -3.911,-6.984 -3.111,-6.984 -2.889,-7.207 ; -2.721,-7.374 -2.889,-7.207 ; -2.554,-7.207 -2.889,-7.207
  Top Layer w0.254: Y1.3@-3.676,-9.492 -2.721,-8.538 -2.721,-7.374 -2.433,-7.086 -1.87,-7.086 -1.546,-6.762 IC1.5
OSC_OUTA: C15.2 IC1.6 Y1.1 | length 3.3
  Top Layer w0.254: Y1.1@-1.744,-8.064 -1.561,-8.064 C15.2@-0.526,-9.099 ; Y1.1@-1.181,-7.531 -1.046,-7.396 IC1.6
REGOUT_A: C7.1 U2.10 | length 0.9
  Bottom Layer w0.254: U2.10 C7.1@2.124,-2.165
RX1: IC1.43 Rx1.4 | length 5.9
  Top Layer w0.203: Rx1.4@-4.749,9.094 -4.7,9.094 -3.251,7.645 -2.184,7.645 -1.046,6.507 IC1.43
RX2: IC1.17 Rx2.1 | length 6.2
  Top Layer w0.2: IC1.17 5.904,-4.684 5.258,-5.33 5.258,-7.008 7.286,-9.036 Rx2.1@7.286,-9.115
RX3: IC1.30 Rx3.4 | length 2.3
  Top Layer w0.2: IC1.30 Rx3.4@8.164,2.479
RX4: IC1.52 Rx4.3 | length 2.9
  Top Layer w0.2: Rx4.3 -7.655,0.88 -6.555,1.979 IC1.52
RX5: IC1.54 | length 0.1
  Top Layer w0.2: IC1.54@-5.533,1.017 IC1.54
SCK: IC1.21 SPI.4 | length 2.4
  Top Layer w0.2: IC1.21 7.686,-2.021 SPI.4@8.154,-2.489
SCL1/SERVO7: IC1.58 R11.1 Rx4.2 U4.10 | length 7.7
  Top Layer w0.2: Rx4.2 -7.045,-0.37 -6.395,-1.021 IC1.58 -4.272,-1.021 -4.038,-0.787 v1@-3.809,-0.787
  Bottom Layer w0.2: v1(-3.784,-0.634) R11.1@-3.784,0.222 ; R11.1@-3.721,0.204 -3.784,0.267 -3.784,1.22 -3.555,1.448 U4.10@-3.555,2.439
SCL3: U2.7
SDA1/SERVO8: IC1.59 R12.1 Rx4.1 U4.9 | length 8.8
  Top Layer w0.2: Rx4.1@-7.875,-1.521 IC1.59
  Bottom Layer w0.2: Rx4.1 -6.49,-1.62 R12.1 -5.504,0.566 -4.394,1.677 U4.9@-4.394,2.464
SDA3: U2.6
SERVO_1: IC1.37 Q1.1 R5.2 SRV.1 | length 10.4
  Top Layer w0.2: IC1.37 1.954,6.399 2.464,6.909 3.785,6.909 SRV.1@5.965,9.089 ; SRV.1 6.96,9.399 7.496,9.935 7.928,9.935 8.568,10.575 8.568,11.006 9.104,11.542 Q1.1@9.138,11.542
SERVO_2: IC1.38 Q2.1 R6.2 SRV.2 | length 20
  Top Layer w0.2: Q2.1 -7.528,9.642 -6.76,10.411 3.779,10.411 4.715,9.475 SRV.2 ; IC1.38 1.454,6.935 2.114,7.595 3.201,7.595 SRV.2@4.715,9.109
SERVO_3: IC1.39 SRV.3 | length 5
  Top Layer w0.2: IC1.39 0.954,6.909 0.954,7.126 1.982,8.154 2.464,8.154 SRV.3@3.465,9.155
SERVO_4: IC1.40 SRV.4 | length 4.4
  Top Layer w0.2: IC1.40 0.454,6.931 0.454,7.337 SRV.4@2.215,9.098
SERVO_5: IC1.14 Q4.1 R8.2 Rx2.4 | length 16.8
  Top Layer w0.2: Q4.1 -6.69,-11.465 -6.4,-11.175 2.109,-11.175 Rx2.4@3.536,-9.748 ; IC1.14 2.954,-6.724 3.104,-6.874 3.104,-7.408 3.536,-7.84 Rx2.4@3.536,-9.423
SERVO_6: IC1.15 Q3.1 R7.2 Rx2.3 | length 8.8
  Top Layer w0.2: IC1.15 3.454,-7.263 4.294,-8.103 4.294,-8.585 Rx2.3@4.75,-9.042 ; Rx2.3@4.786,-9.423 4.786,-9.712 5.69,-10.617 7.671,-10.617 8.672,-9.616 Q3.1
SS: IC1.20 SPI.5 | length 6.7
  Top Layer w0.2: v1@4.433,-1.803 5.15,-2.521 IC1.20 ; IC1.20@5.92,-2.504 IC1.20 ; IC1.20@5.955,-2.572 IC1.20
  Bottom Layer w0.2: v1(4.496,-1.879) 5.614,-1.879 7.474,-3.739 SPI.5
TX1: IC1.42 Rx1.3 | length 5.4
  Top Layer w0.203: Rx1.3@-3.479,9.016 -2.515,8.052 -1.575,8.052 -0.546,7.023 IC1.42
TX2: IC1.16 Rx2.2 | length 4
  Top Layer w0.2: IC1.16 3.954,-7.052 Rx2.2@6.036,-9.133
TX3: IC1.29 Rx3.3 | length 4.3
  Top Layer w0.2: IC1.29 6.861,1.979 v1@7.29,1.55
  Bottom Layer w0.2: v1@7.29,1.55 7.269,1.571 7.269,2.834 8.205,3.77 Rx3.3@8.281,3.77
  other v1: 7.265,1.652
TX4: IC1.51 Rx4.4 | length 2.3
  Top Layer w0.254: Rx4.4@-7.594,2.083 -6.984,2.083 -6.588,2.479 IC1.51
TX5: IC1.53
VBAT_MEAS: C23.2 IC1.24 R9.1 R10.2 | length 13.1
  Top Layer w0.2: v1(-1.015,-4.495) 2.972,-0.507 3.963,-0.507 4.319,-0.152 4.369,-0.152 4.738,-0.521 IC1.24
  Bottom Layer w0.2: R9.1@-2.597,-5.689 -2.597,-5.035 -2.057,-4.495 v1@-0.965,-4.495 ; v1@4.351,-0.094 C23.2@6.071,-0.094
  other v1: 4.344,-0.101
VCAP1A: C14.2 IC1.31 | length 2.5
  Top Layer w0.254: C14.2 6.986,4.122 6.986,3.252 6.713,2.979
  Top Layer w0.3: IC1.31 6.713,2.979
VCAP2A: C13.2 IC1.47 | length 2.5
  Top Layer w0.254: C13.2@-4.444,6.859 -3.544,6.859 -3.046,6.36 IC1.47
VCCMS56: C1.2 L1.2 U1.1 | length 2.4
  Bottom Layer w0.2: L1.2@-0.584,7.849 C1.2@0.476,7.849 ; U1.1@0.229,6.528 C1.2@0.229,7.848
XSHUT: R13.1 U4.5 | length 2.4
  Bottom Layer w0.2: U4.5 -6.009,4.875 -6.009,6.31 R13.1@-5.385,6.934
pads on no net: IC1.3 IC1.26 IC1.28 IC1.44 IC1.45 IC1.61 IC1.62 U2.2 U2.3 U2.4 U2.5 U2.14 U2.15 U2.16 U2.17 U2.19 U2.21 U2.22 U4.8
copper on no net: | length 64.6
  Bottom Layer w0.2: -9.25,-7.5 -9.25,8 -6.5,10.75 6.75,10.75 7.75,9.75 ; -8,-10.75 -7.75,-11 7.75,-11 10,-8.75 10,-8 ; 10,-5.25 10,5.5

## Polygon pours and split planes (outlines as drawn)
LIPO on Top Layer "NORELIEF" (solid, pour order 1000): -11.836,-7.734 -10.159,-7.734 -10.007,-7.581 -10.007,-6.54 -10.312,-6.235 -10.972,-6.235 -11.15,-6.413 -11.709,-6.413 -12.09,-6.794 -12.09,-7.48 -12.039,-7.531
LIPO on Top Layer "NORELIEF" (solid, pour order 1001): 11.507,-7.67 10.796,-7.67 10.643,-7.823 10.364,-7.823 10.059,-7.518 10.059,-6.527 10.415,-6.172 11.558,-6.172 12.04,-6.654 12.04,-7.645 12.015,-7.67
LIPO on Top Layer "NORELIEF" (solid, pour order 1002): 11.532,7.697 10.034,7.697 9.78,7.443 9.78,6.579 10.288,6.071 11.1,6.071 11.888,6.859 11.888,7.341 11.812,7.417
GND on Top Layer "NORELIEF" (solid, pour order 1003): 8.052,9.373 8.205,9.373 8.433,9.602 8.713,9.881 8.713,9.983 9.399,9.983 9.932,9.449 9.932,8.84 9.627,8.535 9.602,8.56 8.433,8.56 8.357,8.56 7.976,8.941
GND on Top Layer "NORELIEF" (solid, pour order 1004): -8.508,11.989 -9.575,11.989 -9.982,11.583 -9.982,10.999 -9.397,10.415 -8.635,10.415 -8.305,10.745 -8,10.745 -7.873,10.872 -8,10.999 -8,11.786 -8,11.812 -8.178,11.989
LIPO on Top Layer "NORELIEF" (solid, pour order 1005): -11.836,7.57 -10.185,7.57 -9.956,7.341 -9.956,6.3 -10.388,5.868 -11.074,5.868 -11.836,6.63
GND on Top Layer "NORELIEF" (solid, pour order 1006): 8.967,-11.963 9.805,-11.963 10.11,-11.658 10.11,-11.099 9.551,-10.54 9.449,-10.439 8.941,-10.439 8.662,-10.718 8.408,-10.718 8.408,-11.734 8.56,-11.887
GND on Top Layer "NORELIEF" (solid, pour order 1007): -8.559,-10.109 -9.22,-10.109 -9.677,-9.651 -9.677,-8.813 -9.093,-8.229 -9.016,-8.153 -7.061,-8.153 -6.629,-8.585 -6.629,-9.778 -6.629,-9.982 -6.934,-10.286 -7.391,-10.286 -7.823,-9.855 -8.077,-9.855 -8.178,-9.956 -8.178,-10.312 -8.204,-10.337
GND on Top Layer "NORELIEF" (solid, pour order 1008): 9.347,5.74 7.696,5.74 7.188,5.232 6.96,5.004 6.452,5.004 6.452,5.359 6.401,5.41 6.35,5.461 6.198,5.461 6.045,5.309 6.02,5.309 5.766,5.309 5.588,5.486 5.232,5.842 5.232,6.375 6.909,8.052 7.95,8.052 8.103,8.052 9.347,6.807
LIPO on Bottom Layer "NORELIEF" (solid, pour order 1009): -11.836,7.57 -10.185,7.57 -9.956,7.341 -9.956,6.3 -10.388,5.868 -11.074,5.868 -11.836,6.63
GND on Bottom Layer "NORELIEF" (solid, pour order 1010): -9.753,12.04 -8.661,12.04 -8.331,11.71 -8.331,10.821 -8.686,10.465 -9.321,10.465 -9.499,10.643 -9.931,11.075 -9.931,11.862
GND on Bottom Layer "NORELIEF" (solid, pour order 1011): 8.891,10.135 9.246,10.135 9.932,9.449 9.932,8.814 9.678,8.56 8.56,8.56 8.179,8.941 8.179,9.602 8.713,10.135
LIPO on Bottom Layer "NORELIEF" (solid, pour order 1012): 9.983,7.722 11.761,7.722 12.091,7.392 12.091,6.986 11.202,6.097 10.338,6.097 9.881,6.554 9.881,7.621
LIPO on Bottom Layer "NORELIEF" (solid, pour order 1013): 10.389,-6.146 11.024,-6.146 11.304,-6.426 11.634,-6.756 11.634,-7.315 11.253,-7.696 10.821,-7.696 10.719,-7.797 10.313,-7.797 10.059,-7.543 10.059,-6.476
GND on Bottom Layer "NORELIEF" (solid, pour order 1014): 8.891,-10.439 9.424,-10.439 10.059,-11.074 10.059,-11.633 9.678,-12.014 8.764,-12.014 8.459,-11.709 8.459,-10.871 8.84,-10.49
LIPO on Bottom Layer "NORELIEF" (solid, pour order 1015): -12.141,-6.984 -11.455,-6.299 -10.464,-6.299 -10.337,-6.299 -10.032,-6.603 -10.032,-7.569 -10.185,-7.721 -10.21,-7.746 -11.607,-7.746 -11.81,-7.746 -12.141,-7.416
GND on Bottom Layer "NORELIEF" (solid, pour order 1016): -9.728,-8.788 -9.728,-9.474 -9.143,-10.058 -8.94,-10.261 -7.01,-10.261 -6.934,-10.261 -6.603,-9.931 -6.603,-8.839 -6.756,-8.686 -6.756,-8.153 -6.807,-8.102 -9.067,-8.102 -9.728,-8.762
GND on Bottom Layer "NORELIEF" (solid, pour order 1017): 5.25,6 5.535,5.715 9.449,5.715 9.601,5.867 9.601,6.248 9.601,6.629 8.357,7.874 8.026,8.204 6.934,8.204 6.858,8.204 5.258,6.604
GND on Bottom Layer "NORELIEF" (solid, pour order 1018): -6.045,-7.366 -6.934,-6.477 -7.722,-6.477 -9.144,-7.899 -9.144,-8.357 -8.966,-8.534 -7.163,-8.534 -7.112,-8.484
+3.3V on Vcc (split plane): -1.397,9.475 -1.353,9.438 -1.381,9.344 -1.391,9.246 -1.381,9.148 -1.353,9.054 -1.306,8.967 -1.244,8.891 -1.168,8.828 -1.081,8.782 -0.986,8.753 -0.888,8.744 5.843,8.744 5.941,8.753 5.991,8.769 6.94,7.819 6.925,7.769 6.915,7.671 6.915,7.194 6.58,6.858 6.575,6.853 5.893,6.853 5.795,6.843 5.701,6.815 5.614,6.768 5.538,6.706 5.476,6.63 5.429,6.543 5.401,6.449 5.391,6.351 5.401,6.253 5.429,6.158 5.476,6.071 5.538,5.995 5.614,5.933 5.701,5.886 5.795,5.858 5.893,5.848 8.535,5.848 8.577,5.852 9.023,5.406 9.023,4.578 8.891,4.445 8.828,4.369 8.782,4.282 8.753,4.188 8.744,4.09 8.744,3.903 8.737,3.911 8.661,3.974 8.574,4.02 8.48,4.049 8.382,4.058 8.284,4.049 8.19,4.02 8.103,3.974 8.027,3.911 7.964,3.835 7.918,3.748 7.889,3.654 7.88,3.556 7.88,2.901 7.116,2.137 7.037,2.095 6.961,2.032 6.898,1.956 6.852,1.869 6.823,1.775 6.813,1.677 6.813,1.652 6.813,1.601 6.813,1.575 6.823,1.477 6.852,1.383 6.898,1.296 6.961,1.22 7.037,1.158 7.062,1.144 8.434,-0.228 8.51,-0.29 8.597,-0.337 8.691,-0.365 8.748,-0.371 8.748,-4.068 8.757,-4.166 8.786,-4.261 8.832,-4.348 8.895,-4.424 9.073,-4.602 9.073,-5.253 8.895,-5.432 8.845,-5.492 8.306,-5.492 8.208,-5.502 8.114,-5.53 8.027,-5.577 7.951,-5.639 4.643,-8.946 -1.137,-8.946 -2.819,-7.265 -2.895,-7.202 -2.982,-7.156 -3.076,-7.127 -3.174,-7.118 -4.685,-7.118 -4.688,-7.112 -4.75,-7.036 -5.893,-5.893 -5.969,-5.831 -6.056,-5.784 -6.15,-5.756 -6.248,-5.746 -6.878,-5.746 -7.371,-5.253 -7.371,-0.817 -6.557,-0.003 -6.477,0.039 -6.401,0.102 -6.339,0.178 -6.292,0.265 -6.264,0.359 -6.254,0.457 -6.264,0.555 -6.292,0.649 -6.339,0.736 -6.401,0.812 -7.299,1.71 -7.308,1.742 -7.355,1.829 -7.371,1.848 -7.371,8.251 -6.395,9.226 -3.809,9.226 -3.711,9.236 -3.617,9.265 -3.53,9.311 -3.454,9.374 -2.636,10.192 -2.114,10.192
LIPO on Vcc (split plane): 12.24,10.789 12.24,6.408 11.374,5.543 11.311,5.466 11.264,5.378 11.235,5.282 11.225,5.182 11.225,-5.435 11.235,-5.535 11.264,-5.63 11.311,-5.719 11.374,-5.796 12.24,-6.661 12.24,-10.789 10.789,-12.24 10.712,-12.24 10.701,-12.202 10.655,-12.115 10.592,-12.039 10.186,-11.633 10.11,-11.57 10.023,-11.524 9.928,-11.495 9.83,-11.486 7.773,-11.486 7.675,-11.495 7.581,-11.524 7.494,-11.57 7.418,-11.633 7.399,-11.656 -5.291,-11.656 -5.391,-11.665 -5.486,-11.694 -5.575,-11.742 -5.652,-11.805 -6.086,-12.24 -10.789,-12.24 -12.24,-10.789 -12.24,-6.916 -10.281,-4.958 -10.218,-4.88 -10.17,-4.792 -10.141,-4.696 -10.132,-4.597 -10.132,4.115 -10.141,4.215 -10.17,4.311 -10.218,4.399 -10.281,4.476 -12.24,6.435 -12.24,10.789 -11.414,11.614 -10.469,11.614 -8.409,9.554 -8.388,9.486 -8.376,9.462 -8.376,8.657 -8.393,8.636 -8.439,8.549 -8.468,8.455 -8.477,8.357 -8.468,8.259 -8.439,8.165 -8.393,8.078 -8.376,8.057 -8.376,-6.503 -8.366,-6.601 -8.338,-6.695 -8.291,-6.782 -8.229,-6.858 -7.568,-7.519 -7.492,-7.581 -7.405,-7.628 -7.311,-7.656 -7.213,-7.666 -6.888,-7.666 -6.578,-7.975 -6.502,-8.038 -6.415,-8.084 -6.321,-8.113 -6.223,-8.122 -3.382,-8.122 -1.7,-9.804 -1.624,-9.867 -1.537,-9.913 -1.443,-9.942 -1.345,-9.951 6.579,-9.951 6.677,-9.942 6.771,-9.913 6.858,-9.867 6.934,-9.804 9.605,-7.133 9.668,-7.057 9.714,-6.97 9.743,-6.875 9.752,-6.777 9.752,-5.995 9.931,-5.816 9.994,-5.74 10.04,-5.653 10.069,-5.559 10.078,-5.461 10.078,-4.394 10.069,-4.296 10.04,-4.202 9.994,-4.115 9.931,-4.039 9.752,-3.86 9.752,0.759 9.749,0.797 9.749,3.882 9.881,4.014 9.943,4.09 9.99,4.177 10.018,4.271 10.028,4.369 10.028,5.944 10.018,6.042 9.99,6.136 9.943,6.223 9.881,6.299 7.155,9.025 7.17,9.054 7.199,9.148 7.209,9.246 7.209,10.669 7.202,10.733 7.2,10.758 7.27,10.816 8.694,12.24 10.789,12.24
+3.3V on Vcc (split plane): 7.906,6.853 7.9,6.853 7.901,6.858
GND on GND (split plane): 160 vertices, not listed, extent -12.24,-12.24 12.24,12.24
GND on GND (split plane): 11.563,-7.36 11.425,-7.499 11.425,-7.259 11.481,-7.213 11.563,-7.131

## Keep-outs
Keep-Out Layer:
  the board outline again, w1

## Other copper
Top Layer:
  text "CDW" at -10.058,5.131 h0.8 r270
  text "WhooPprz" at 10.923,-5.714 h1 r90
Bottom Layer:
  text "Mx1" at 6.756,4.928 h1 r90
Vcc (plane layer: these items are gaps in the copper):
  lines w1: -8.508,-9.27 -8.508,-9.728 -8.483,-9.753 -7.289,-9.753 ; -7.975,8.357 -6.553,9.78 ; -7.924,9.678 -7.924,9.78 -10.261,12.116 -11.785,12.116 -11.633,12.269 -8.788,12.269 -8.381,11.862 -8.381,11.151 -8.915,11.685 -8.153,11.685 -6.857,10.389 -3.708,10.389 -3.403,10.694 6.681,10.694 6.706,10.669 6.706,9.246 6.097,9.856 6.097,10.364 ; -7.873,12.701 -7.873,-6.503 -7.213,-7.163 -6.68,-7.163 -6.223,-7.62 -3.174,-7.62 -1.345,-9.449 6.579,-9.449 ; -7.849,-0.584 -6.807,0.457 ; -7.798,-5.537 -7.087,-6.248 -6.248,-6.248 -5.105,-7.391 ; -7.772,1.549 -7.849,1.549 -6.756,0.457 ; -7.365,9.729 -3.809,9.729 -2.793,10.745 -1.6,10.745 ; -6.045,-6.908 -5.994,-6.908 ; -1.829,10.617 -1.041,9.83 ; -0.888,9.246 5.843,9.246 ; -0.812,9.957 5.512,9.957 9.526,5.944 9.526,4.369 9.246,4.09 9.246,0.763 9.25,0.759 9.25,-4.068 9.576,-4.394 9.576,-5.461 9.25,-5.787 9.25,-6.777 ; 2.184,-4.47 2.184,-3.302 ; 5.893,6.351 8.535,6.351 ; 6.935,6.503 7.417,6.986 7.417,7.671 ; 7.316,1.575 7.316,1.677 ; 7.316,1.626 8.382,2.692 8.382,3.556 ; 7.316,1.652 7.316,1.601 8.789,0.128 ; 7.773,-11.988 9.83,-11.988 10.237,-12.395 ; 8.687,6.452 9.449,5.69 ; 8.941,0.787 8.357,1.372 8.357,1.803 8.992,2.438 8.992,2.616 ; 8.966,-6.35 5.994,-9.322 4.978,-9.322 8.306,-5.994 9.144,-5.994 ; 6.579,-9.449 9.25,-6.777 ; 6.579,-9.449 9.25,-6.777 ; 6.579,-9.449 9.25,-6.777
GND (plane layer: these items are gaps in the copper):
  lines w1: -12.699,9.526 -12.572,9.526 -11.226,8.179 -11.226,7.367 -12.42,6.173 -12.42,8.002 -11.937,8.484 -11.937,8.078 -11.887,8.027 -11.887,7.316 ; -12.598,-7.035 -11.556,-8.077 -11.556,-8.661 -12.42,-9.524 -12.42,-8.483 -12.115,-8.178 ; -11.81,6.376 -10.642,5.208 -10.642,3.912 -10.591,3.861 -10.591,6.351 ; -11.76,-6.959 -10.591,-5.791 -10.591,-4.495 ; -11.735,-5.968 -11.201,-6.503 -11.201,-8.508 ; -11.532,-8.458 -11.303,-8.458 ; -11.354,6.325 -10.795,6.883 -10.389,6.883 ; -11.201,8.256 -11.201,7.951 -10.642,7.392 ; -11.1,-8.255 -11.1,-7.976 -10.592,-7.468 ; -10.77,6.96 -10.719,7.01 ; -10.643,-7.01 -10.643,-6.148 ; -8.255,-1.778 -8.255,4.953 ; -7.798,-0.66 -6.68,0.457 ; -7.798,1.524 -6.756,0.483 ; -7.747,-1.727 -7.747,4.801 ; -1.473,-3.251 -1.473,-4.166 -1.168,-4.47 ; -1.041,-3.327 -1.041,-3.353 -0.051,-4.343 ; 7.341,1.55 7.341,1.398 8.433,0.305 ; 7.367,1.677 7.519,1.677 8.179,2.337 ; 10.465,6.503 10.491,6.503 11.659,5.335 ; 10.617,7.087 10.973,7.442 11.227,7.442 12.446,6.223 ; 10.643,-6.603 10.643,-6.502 11.583,-5.562 ; 10.923,-7.137 10.923,-8.381 12.345,-9.804 12.345,-8.635 12.066,-8.356 ; 10.973,8.51 10.973,6.909 12.116,5.766 ; 11.126,-8.127 11.507,-8.127 12.066,-7.569 12.066,-5.918 11.126,-6.857 ; 11.126,8.56 12.624,10.059 12.624,8.891 11.812,8.078 11.812,7.57 12.345,7.036 ; 11.888,-5.943 11.939,-5.943 12.027,-5.854

## Silkscreen, mask and mechanical layers (free items; w line width, h text height)
Bottom Overlay:
  circle w0.254: c-7.25,7.25 r0.8
  circle w0.254: c-7.25,-7.25 r0.8
  circle w0.254: c7.25,-7.25 r0.8
  circle w0.254: c7.25,7.25 r0.8
  lines w0.254: -9.397,-9.143 -7.619,-10.921 7.9,-10.921 10.008,-8.813 10.008,7.57 6.757,10.821 -6.527,10.821 -9.397,7.951 -9.397,-9.143
Mechanical 13:
  circle w0.254: c10.25,0 r0.8
  circle w0.254: c-10.25,0 r0.8
  circle w0.254: c0,-10.25 r0.8
  circle w0.254: c0,10.25 r0.8
  circle w0.254: c-7.25,7.25 r0.8
  circle w0.254: c-7.25,-7.25 r0.8
  circle w0.254: c7.25,-7.25 r0.8
  circle w0.254: c7.25,7.25 r0.8
  lines w0.2: -12.75,0 12.75,0 ; 0,-12.75 0,12.75

## Dimensions
8.483,12.75 to 8.179,-12.75 on Top Overlay
12.75,11 to -12.75,11 on Top Overlay